# Altium PCB DIOT_Sampler.PCBDOC (part 6 of 8)
Units mm, origin at the board's own origin, x right, y up, seen from the top; angles counter-clockwise.
Board outline 221.17 x 100 mm, 4 copper layers (Top, GP1(GND), L3, Bot), stack 1.648 mm thick; 666 components, 413 nets, 2132 pads, 925 vias.
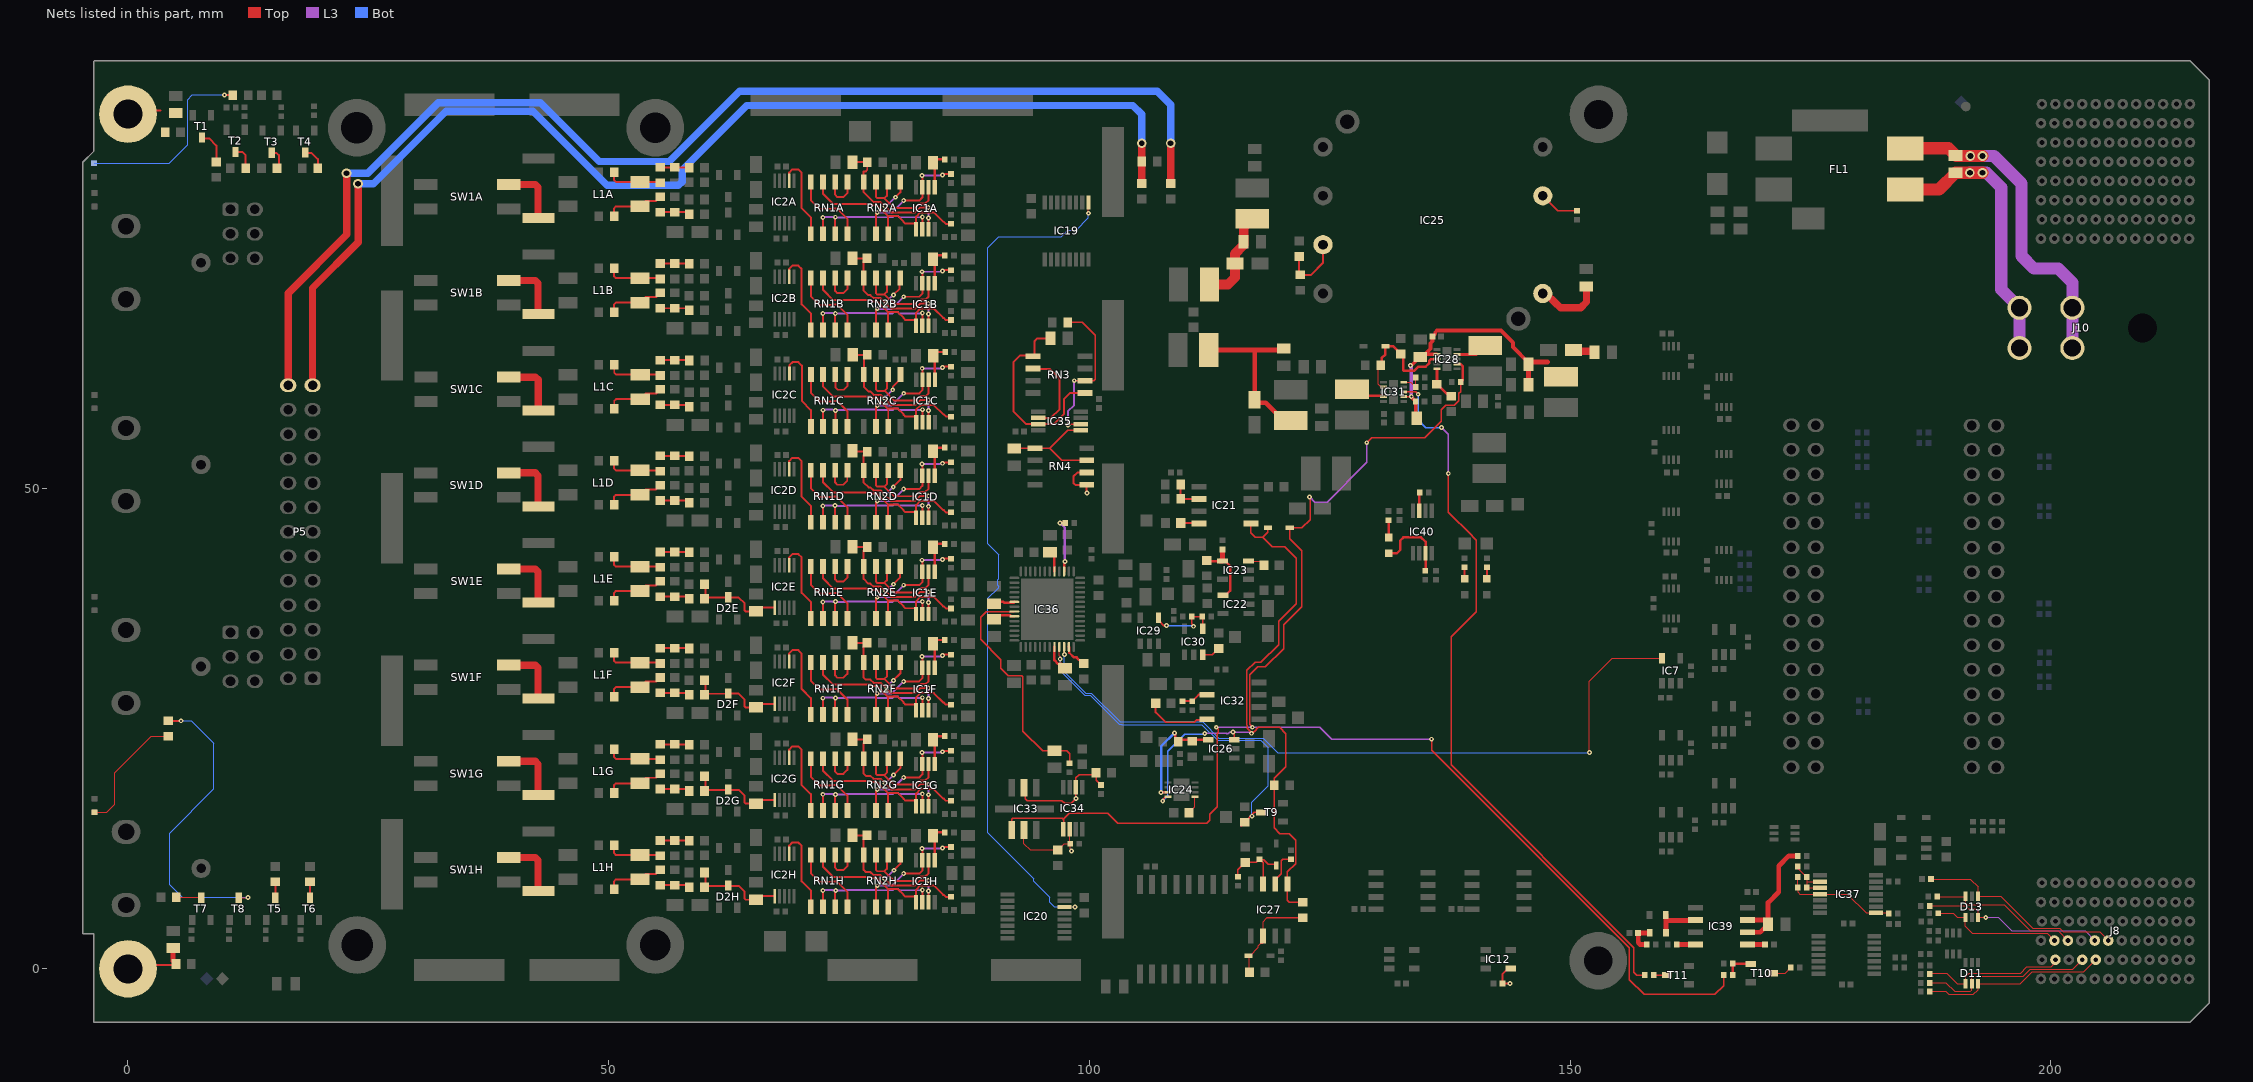
[diagram p7: the nets of this part, all layers, seen from the top]

## Via types
v1: diameter 0.5, hole 0.2, Top to Bot, tented both sides, 704 vias
v2: diameter 0.5, hole 0.2, Top to Bot, 180 vias
v3: diameter 0.6, hole 0.3, Top to Bot, tented both sides, 17 vias
v4: diameter 1, hole 0.6, Top to Bot, tented both sides, 16 vias
v5: diameter 0.6, hole 0.3, Top to Bot, 6 vias
v6: diameter 1.27, hole 0.711, Top to Bot, 2 vias

## Nets (pads, with @x,y where several pads share a name; then routed paths per layer and width w, separated by ;. In a path a pad name is that pad's centre, name@x,y a point inside that pad or via, vN(x,y) a via of type N, cw(c..) or ccw(c..) an arc to the next point about the centre after c; other vN are vias at no path point) (continued)
NetC2E_1: C2E.1 C5E.2 D2E.3 IC2E.1 R10E.2 | length 9.7
  Top w0.203: C5E.2@60.082,39.9 60.082,38.616 62.393,38.616 D2E.3@62.399,38.622 ; D2E.3@62.433,38.656 D2E.3@62.399,38.622 ; IC2E.1@67.275,37.567 65.705,37.567 C2E.1@65.329,37.19 64.249,37.19 64.142,37.298 64.142,38.004 63.524,38.622 D2E.3@62.399,38.622
NetC2F_1: C2F.1 C5F.2 D2F.3 IC2F.1 R10F.2 | length 9.7
  Top w0.203: C5F.2@60.082,29.9 60.082,28.616 62.393,28.616 D2F.3@62.399,28.622 ; D2F.3@62.433,28.656 D2F.3@62.399,28.622 ; IC2F.1@67.275,27.567 65.705,27.567 C2F.1@65.329,27.19 64.249,27.19 64.142,27.298 64.142,28.004 63.524,28.622 D2F.3@62.399,28.622
NetC2G_1: C2G.1 C5G.2 D2G.3 IC2G.1 R10G.2 | length 9.7
  Top w0.203: C5G.2@60.082,19.9 60.082,18.616 62.393,18.616 D2G.3@62.399,18.622 ; D2G.3@62.433,18.656 D2G.3@62.399,18.622 ; IC2G.1@67.275,17.567 65.705,17.567 C2G.1@65.329,17.19 64.249,17.19 64.142,17.298 64.142,18.004 63.524,18.622 D2G.3@62.399,18.622
NetC2H_1: C2H.1 C5H.2 D2H.3 IC2H.1 R10H.2 | length 9.7
  Top w0.203: C5H.2@60.082,9.9 60.082,8.616 62.393,8.616 D2H.3@62.399,8.622 ; D2H.3@62.433,8.656 D2H.3@62.399,8.622 ; IC2H.1@67.275,7.567 65.705,7.567 C2H.1@65.329,7.19 64.249,7.19 64.142,7.298 64.142,8.004 63.524,8.622 D2H.3@62.399,8.622
NetC3A_2: C3A.2 IC1A.3 R7A.2 RN2A.1 RN2A.4 | length 18.6
  Top w0.203: C3A.2@75.369,83.655 C3A.2@75.369,83.905 76.869,83.905 R7A.2@76.894,83.88 76.894,83.105 76.739,82.95 76.524,82.95 RN2A.4@76.524,81.855 76.524,80.775 77.544,79.755 78.294,79.755 v1@78.694,79.355 ; v1(78.744,79.355) v1@78.694,79.355 ; v1(79.819,80.255) 80.334,80.77 RN2A.1@80.334,81.855 ; v1(83.244,79.205) 82.394,79.205 81.869,78.68 79.369,78.68 v1@78.694,79.355 ; v1(83.248,78.109) 83.269,78.088 IC1A.3@83.269,76.909
  L3 w0.203: v1(78.744,79.355) 78.919,79.355 v1(79.819,80.255) ; v1(83.244,79.205) 83.248,79.201 v1(83.248,78.109)
NetC3B_2: C3B.2 IC1B.3 R7B.2 RN2B.1 RN2B.4 | length 18.2
  Top w0.203: C3B.2@75.369,73.905 75.394,73.88 76.844,73.88 76.524,73.56 RN2B.4@76.524,71.855 76.524,70.555 77.003,70.076 77.223,70.076 77.544,69.755 78.294,69.755 v1(78.832,69.217) 79.369,68.68 81.869,68.68 82.394,69.205 v1(83.244,69.205) ; v1(79.619,70.105) 80.269,70.755 80.269,71.79 RN2B.1@80.334,71.855 ; v1(83.248,68.109) 83.269,68.088 IC1B.3@83.269,66.909
  L3 w0.203: v1(78.832,69.217) 78.832,69.318 v1(79.619,70.105) ; v1(83.244,69.205) 83.248,69.201 v1(83.248,68.109)
NetC3C_2: C3C.2 IC1C.3 R7C.2 RN2C.1 RN2C.4 | length 18.1
  Top w0.203: C3C.2@75.382,63.861 75.388,63.855 R7C.2@76.894,63.855 76.537,63.498 RN2C.4@76.537,61.812 76.537,60.53 77.034,60.033 77.235,60.033 77.557,59.711 78.307,59.711 79.382,58.636 81.882,58.636 82.407,59.161 v1(83.257,59.161) ; v1(79.544,60.23) 79.544,60.53 80.347,61.333 RN2C.1@80.347,61.812 ; v1(83.261,58.065) 83.282,58.045 IC1C.3@83.282,56.865
  L3 w0.203: v1(78.694,59.38) v1(79.544,60.23) ; v1(83.257,59.161) 83.261,59.157 v1(83.261,58.065)
NetC3D_2: C3D.2 IC1D.3 R7D.2 RN2D.1 RN2D.4 | length 18.2
  Top w0.203: C3D.2@75.369,53.905 75.469,53.805 R7D.2@76.894,53.805 76.524,53.435 RN2D.4@76.524,51.855 76.524,50.58 77.028,50.076 77.223,50.076 77.544,49.755 78.294,49.755 v1(78.719,49.33) 79.369,48.68 81.869,48.68 82.394,49.205 v1(83.244,49.205) ; v1(79.594,50.13) 80.334,50.87 RN2D.1@80.334,51.855 ; v1(83.248,48.109) 83.269,48.088 IC1D.3@83.269,46.909
  L3 w0.203: v1(78.719,49.33) 78.794,49.33 v1(79.594,50.13) ; v1(83.244,49.205) 83.248,49.201 v1(83.248,48.109)
NetC3E_2: C3E.2 IC1E.3 R7E.2 RN2E.1 RN2E.4 | length 18.3
  Top w0.203: C3E.2@75.369,43.905 75.394,43.88 R7E.2@76.894,43.88 76.524,43.51 RN2E.4@76.524,41.855 76.524,40.555 77.003,40.076 77.223,40.076 77.544,39.755 78.294,39.755 79.369,38.68 81.869,38.68 82.394,39.205 v1(83.244,39.205) ; v1(79.619,40.005) 80.294,40.68 80.294,41.815 RN2E.1@80.334,41.855 ; v1(83.248,38.109) 83.269,38.088 IC1E.3@83.269,36.909
  L3 w0.203: v1(78.794,39.33) 78.944,39.33 v1(79.619,40.005) ; v1(83.244,39.205) 83.248,39.201 v1(83.248,38.109)
NetC3F_2: C3F.2 IC1F.3 R7F.2 RN2F.1 RN2F.4 | length 18.4
  Top w0.203: C3F.2@75.369,33.905 R7F.2@76.869,33.905 76.524,33.56 RN2F.4@76.524,31.855 76.524,30.3 76.748,30.076 77.223,30.076 77.544,29.755 78.294,29.755 79.369,28.68 81.869,28.68 82.394,29.205 v1(83.244,29.205) ; v1(79.619,30.005) 80.334,30.72 RN2F.1@80.334,31.855 ; v1(83.248,28.109) 83.269,28.088 IC1F.3@83.269,26.909
  L3 w0.203: v1(78.929,29.155) 78.929,29.315 v1(79.619,30.005) ; v1(83.244,29.205) 83.248,29.201 v1(83.248,28.109)
NetC3G_2: C3G.2 IC1G.3 R7G.2 RN2G.1 RN2G.4 | length 18.4
  Top w0.203: C3G.2@75.369,23.905 75.394,23.88 R7G.2@76.894,23.88 76.524,23.51 RN2G.4@76.524,21.855 76.524,20.3 76.748,20.076 77.223,20.076 77.544,19.755 78.294,19.755 v1(78.744,19.305) 79.369,18.68 81.869,18.68 82.394,19.205 v1(83.244,19.205) ; v1(79.619,20.155) 80.334,20.87 RN2G.1@80.334,21.855 ; v1(83.248,18.109) 83.269,18.088 IC1G.3@83.269,16.909
  L3 w0.203: v1(78.744,19.305) 78.769,19.305 v1(79.619,20.155) ; v1(83.244,19.205) 83.248,19.201 v1(83.248,18.109)
NetC3H_2: C3H.2 IC1H.3 R7H.2 RN2H.1 RN2H.4 | length 18.3
  Top w0.203: C3H.2@75.394,13.88 R7H.2@76.869,13.88 76.524,13.535 RN2H.4@76.524,11.855 76.524,10.3 76.748,10.076 77.223,10.076 77.544,9.755 78.294,9.755 79.369,8.68 81.869,8.68 82.394,9.205 v1(83.244,9.205) ; v1(79.669,10.255) 80.334,10.92 RN2H.1@80.334,11.855 ; v1(83.248,8.109) 83.269,8.088 IC1H.3@83.269,6.909
  L3 w0.203: v1(78.694,9.405) 78.819,9.405 v1(79.669,10.255) ; v1(83.244,9.205) 83.248,9.201 v1(83.248,8.109)
NetC12A_2: C12A.2 IC1A.5 R13A.2 | length 4
  Top w0.254: IC1A.5@83.919,81.309 83.919,83.655 C12A.2@83.744,83.83 84.119,84.205 R13A.2@84.974,84.205
NetC12B_2: C12B.2 IC1B.5 R13B.2 | length 4
  Top w0.254: IC1B.5@83.919,71.309 83.919,73.655 C12B.2@83.744,73.83 84.119,74.205 R13B.2@84.974,74.205
NetC12C_2: C12C.2 IC1C.5 R13C.2 | length 4
  Top w0.254: IC1C.5@83.932,61.265 83.932,63.611 C12C.2@83.757,63.786 84.132,64.161 R13C.2@84.987,64.161
NetC12D_2: C12D.2 IC1D.5 R13D.2 | length 4
  Top w0.254: IC1D.5@83.919,51.309 83.919,53.655 C12D.2@83.744,53.83 84.119,54.205 R13D.2@84.974,54.205
NetC12E_2: C12E.2 IC1E.5 R13E.2 | length 4
  Top w0.254: IC1E.5@83.919,41.309 83.919,43.655 C12E.2@83.744,43.83 84.119,44.205 R13E.2@84.974,44.205
NetC12F_2: C12F.2 IC1F.5 R13F.2 | length 4
  Top w0.254: IC1F.5@83.919,31.309 83.919,33.655 C12F.2@83.744,33.83 84.119,34.205 R13F.2@84.974,34.205
NetC12G_2: C12G.2 IC1G.5 R13G.2 | length 4
  Top w0.254: IC1G.5@83.919,21.309 83.919,23.655 C12G.2@83.744,23.83 84.119,24.205 R13G.2@84.974,24.205
NetC12H_2: C12H.2 IC1H.5 R13H.2 | length 4
  Top w0.254: IC1H.5@83.919,11.309 83.919,13.655 C12H.2@83.744,13.83 84.119,14.205 R13H.2@84.974,14.205
NetC34_1: C34.1 M3.1 R46.2 | length 3.4
  Top w0.203: M3.1@0,89.292 3.407,89.292
NetC36_1: C36.1 M4.1 R47.2 | length 6.8
  Top w0.203: M4.1@0,0.392 4.882,0.392 R47.2@4.996,0.505
  Top w0.508: C36.1@4.694,2.155 4.694,0.807 R47.2@4.996,0.505
NetC40_1: C40.1 IC21.4 | length 1.9
  Top w0.203: C40.1@109.494,46.38 111.338,46.38 IC21.4@111.393,46.324
NetC42_1: C42.1 IC23.3 | length 1.8
  Top w0.127: IC23.3@116.544,42.419 117.728,42.419 118.14,42.007 C42.1@118.14,41.985
NetC46_1: C46.1 IC24.5 | length 1.9
  Top w0.127: C46.1@110.369,16.23 110.369,16.255 110.969,16.855 IC24.5@110.969,17.884
NetC49_2: C49.2 C50.1 L2.2 L3.1 | length 9.8
  Top w1.016: L3.1@112.475,71.175 114.414,71.175 115.144,71.905 115.144,74.38 116.044,75.28 116.044,77.13 L2.2@116.944,78.03
NetC52_1: C52.1 C53.2 C54.2 C55.2 C56.2 C73.2 C74.2 C85.2 C86.2 IC25.1 IC28.2 IC31.2 L4.2 | length 38
  Top w0.152: IC31.2@132.691,59.52 v1(133.481,59.52)
  Top w0.381: v1(133.391,62.77) 133.523,62.77 C74.2@134.409,63.655 134.645,63.655 C74.2@134.904,63.915 ; v1(133.481,59.52) 133.481,59.48 C85.2@133.941,59.02 133.941,57.37 C86.2@134.041,57.27 ; IC28.2@136.142,63.915 C74.2@134.904,63.915 ; C55.2@145.653,62.901 145.653,63.076 144.06,64.669 144.06,65.139 142.802,66.397 136.149,66.397 135.963,66.211 135.963,66.042 C73.2@135.691,65.77 135.691,65.295 135.475,65.079 135.475,64.486 C74.2@134.904,63.915
  Top w0.508: C56.2@145.653,60.742 C55.2@145.653,62.901 145.865,63.113 147.66,63.113
  Top w0.762: IC25.1@147.154,70.245 147.489,70.245 148.435,69.299 148.458,69.299 148.996,68.76 151.093,68.76 151.694,69.361 C53.2@151.694,70.98 ; C52.1@150.073,64.38 C52.1@150.348,64.38 150.473,64.255 152.419,64.255 C54.2@152.544,64.13
  L3 w0.381: v1(133.391,62.77) 133.391,62.737 133.481,62.647 v1(133.481,59.52)
NetC59_2: C59.2 C60.2 L5.2 L6.1 | length 17.5
  Top w0.508: L6.1@112.4,64.375 117.194,64.375 ; C59.2@120.039,64.375 117.194,64.375 ; L5.2@120.944,57.03 120.194,57.03 118.344,58.88 117.494,58.88 C60.2@117.194,59.18 117.194,64.375
NetC65_2: C65.2 D7.2 IC27.3 R59.2 R62.2 | length 8.1
  Top w0.152: R62.2@115.444,9.6 115.444,10.33 C65.2@116.194,11.08 117.364,11.08 R59.2@117.694,11.41 ; IC27.3@118.059,8.83 118.059,11.015 117.719,11.355 118.119,11.355 118.594,10.88 119.304,10.88 D7.2@119.444,10.74
NetC66_2: C66.2 D8.2 IC28.3 IC31.7 R64.1 | length 13.1
  Top w0.127: R64.1@130.291,62.795 130.316,62.77 130.378,62.77 130.441,62.77 130.378,62.707 130.05,62.379 130.05,60.791 130.235,60.606 130.504,60.606 IC31.7@130.591,60.52
  Top w0.254: R64.1@130.291,62.795 130.353,62.857 130.398,62.902 130.398,63.527 130.788,63.917 130.788,64.763 D8.2@130.781,64.77 ; D8.2@130.788,64.77 131.591,64.77 C66.2@132.391,63.97 132.641,63.72 132.641,62.27 132.718,62.193 133.776,62.193 134.233,62.649 134.987,62.649 135.363,63.025 135.363,63.27 135.508,63.415 IC28.3@136.142,63.415
NetC72_2: C72.2 D9.2 IC27.6 R67.1 | length 10.5
  Top w0.127: C72.2@116.644,-0.37 116.644,1.29 D9.2@116.554,1.38 116.719,1.38 117.579,2.24 117.579,2.412 117.837,2.671 118.01,2.671 118.059,2.72 IC27.6@118.059,3.43 118.059,4.92 118.469,5.33
  Top w0.152: 118.469,5.33 R67.1@122.194,5.33
NetC75_1: C75.1 IC30.3 | length 1.9
  Top w0.152: IC30.3@111.795,32.679 112.793,32.679 C75.1@113.444,33.33
NetC82_1: C82.1 IC32.4 | length 6.9
  Top w0.203: C82.1@106.894,27.63 106.894,26.68 107.923,25.651 110.892,25.651 111.121,25.88 112.149,25.88 IC32.4@112.244,25.975
NetC95_2: C95.2 IC36.22 | length 2.4
  Top w0.254: IC36.22@96.364,33.49 96.364,32.111 96.749,31.725 97.093,31.725 C95.2@97.21,31.608
NetC96_2: C96.2 IC36.9 | length 2.3
  Top w0.254: C96.2@90.069,36.366 90.464,36.761 91.748,36.761 91.844,36.665 IC36.9@92.189,36.665
NetC97_2: C97.2 IC36.6 | length 2.3
  Top w0.254: C97.2@90.069,37.995 90.239,38.165 91.055,38.165 91.135,38.085 92.109,38.085 IC36.6@92.189,38.165
NetC98_2: C98.2 IC36.45 | length 2.2
  Top w0.254: C98.2@95.915,43.321 96.364,42.871 IC36.45@96.364,41.34
NetC99_2: C99.2 IC36.8 R81.2 | length 25
  Top w0.152: IC36.8@92.189,37.165 91.24,37.165 91.194,37.12 89.26,37.12 88.694,36.554 88.694,34.271 90.797,32.168 90.797,31.277 91.564,30.51 92.965,30.51 93.084,30.391 93.084,24.74 95.122,22.702 C99.2@96.374,22.702 97.622,22.702 97.948,22.376 R81.2@97.948,21.408
NetC101_2: C101.2 IC33.2 IC34.2 R80.2 | length 9.1
  Top w0.127: IC33.2@93.194,14.434 93.194,13.035 93.863,12.366 96.739,12.366 97.151,12.778 97.151,12.803 97.361,13.013 R80.2@97.864,13.013 ; IC34.2@97.944,14.505 97.944,13.093 R80.2@97.864,13.013 ; v1(98.144,12.259) 98.144,12.36 98.012,12.492 R80.2@98.012,13.013 R80.2@97.864,13.013
NetC102_2: C102.2 IC33.6 IC34.6 R82.1 | length 12.9
  Top w0.152: IC33.6@93.194,18.834 93.301,18.727 93.301,17.711 93.526,17.486 97.146,17.486 97.415,17.217 98.1,17.217 v1(98.594,17.711) IC34.6@98.594,18.905 98.594,19.866 98.944,20.216 100.501,20.216 C102.2@100.694,20.409 100.694,19.63 101.199,19.125 R82.1@101.219,19.125 R82.1@101.239,19.125
NetC103_2: C103.2 IC35.3 RN3.1 RN3.5 | length 21.1
  Top w0.203: C103.2@95.944,65.58 94.569,65.58 94.294,65.305 94.294,63.86 RN3.5@94.144,63.71 94.074,63.78 92.769,63.78 92.09,63.101 92.09,58.009 93.444,56.655 IC35.3@94.694,56.655 96.294,56.655 97.344,57.705 97.344,59.255 97.989,59.9 RN3.1@99.544,59.9
NetC106_2: C106.2 IC35.5 RN4.3 RN4.5 | length 12
  Top w0.152: C106.2@92.194,54.13 95.894,54.13 ; IC35.5@99.094,56.005 97.769,56.005 95.894,54.13 ; RN4.3@99.719,52.89 97.134,52.89 95.894,54.13
NetC109_2: C109.2 IC39.6 IC39.7 R112.2 | length 13.7
  Top w0.508: IC39.6@168.43,3.815 169.752,3.815 C109.2@170.59,4.652 ; IC39.7@168.43,5.085 170.157,5.085 C109.2@170.59,4.652 ; R112.2@173.66,11.75 172.753,11.75 171.7,10.697 171.7,8 170.59,6.89 C109.2@170.59,4.652
NetC111_2: C111.2 IC39.5 | length 1.9
  Top w0.508: IC39.5@168.43,2.545 170.275,2.545 C111.2@170.28,2.55
NetC112_2: C112.2 D15.1 R113.2 | length 3.2
  Top w0.508: R113.2@157.96,2.55 157.272,2.55 157.08,2.742 C112.2@157.08,3.75 D15.1@158.28,3.75
NetC116_1: C116.1 FL1.3 J10.1 J10.2 | length 35.6
  Top w1.27: FL1.3@184.875,85.35 189.35,85.35 190.15,84.55 v4(191.63,84.55) v4(192.891,84.55)
  L3 w1.27: v4(191.63,84.55) 192.63,84.55 194.071,84.55 196.93,81.691 196.93,74.15 198.23,72.85 200.758,72.85 202.235,71.373 J10.1@202.235,68.767 J10.2@202.235,64.567
NetC116_2: C116.2 FL1.1 J10.3 J10.4 | length 30.1
  Top w1.27: FL1.1@184.875,81.05 187.596,81.05 188.35,81.05 C116.2@190.1,82.8 v4(191.58,82.8) v4(192.891,82.8)
  L3 w1.27: v4(191.58,82.8) v4(192.891,82.8) 193.301,82.8 194.844,81.257 194.844,70.658 J10.3@196.735,68.767 J10.4@196.735,64.567
NetC119_2: C119.2 IC12.4 | length 2.9
  Top w0.203: v2(143.752,-1.507) 143.65,-1.507 143.65,-1.5 C119.2@142.95,-1.5 142.95,-0.55 143.55,0.05 IC12.4@143.8,0.05
NetD10_1: D10.1 IC28.7 IC33.1 IC34.1 R69.1 R157.1 | length 157.6
  Top w0.152: IC33.1@91.924,14.434 91.924,15.584 92.013,15.673 97.15,15.673 97.343,15.48 ; IC34.1@97.343,14.578 97.343,15.48 ; v1(113.194,25.13) 113.417,24.907 113.417,24.608 113.28,24.472 113.28,16.869 112.518,16.106 112.518,15.48 112.182,15.144 102.966,15.144 101.93,16.18 97.923,16.18 97.343,15.601 97.343,15.48 ; v1(116.944,25.13) 116.944,25.172 116.666,25.45 116.666,30.566 117.5,31.4 118.3,31.4 120.194,33.294 120.194,35.777 122.1,37.683 122.1,43.49 120.834,44.756 D10.1@120.834,45.88 122.096,45.88 122.952,46.736 122.952,49.036 v1(122.903,49.084) ; v1(128.841,54.729) 128.861,54.729 129.374,55.242 134.869,55.242 136.594,56.967 136.594,58.16 137.057,58.623 137.931,58.623 138.42,59.111 138.42,59.853 138.611,60.044 R69.1@138.611,61.02 ; v2(135.59,23.89) 135.59,22.764 154.271,4.083 156.147,2.207 156.147,-1.116 157.691,-2.66 165.06,-2.66 165.96,-1.76 R157.1@165.96,-0.65
  Top w0.254: IC28.7@138.242,62.915 138.611,62.915 138.611,62.881 138.674,62.819 138.698,62.819 138.846,62.67 138.846,61.255 R69.1@138.611,61.02
  L3 w0.152: v1(113.194,25.13) v1(116.944,25.13) 123.949,25.13 125.189,23.89 v2(135.59,23.89) ; v1(122.903,49.084) 123.433,48.555 124.72,48.555 128.841,52.676 v1(128.841,54.729)
NetD10_2: D10.2 IC21.5 IC24.4 IC26.3 IC27.1 R53.1 R67.2 | length 71.2
  Top w0.152: v1(107.627,17.473) 107.627,17.567 107.944,17.884 IC24.4@108.169,17.884 ; v1(114.944,24.63) 115.044,24.53 IC26.3@115.044,23.83 ; IC21.5@116.793,46.324 116.793,45.352 117.266,44.88 118.044,44.88 ; D10.2@118.554,45.88 118.554,45.39 118.044,44.88 ; R67.2@122.444,7.18 R67.2@122.194,6.93 120.794,6.93 120.599,7.125 IC27.1@120.599,8.83 120.599,10.085 121.457,10.943 121.457,13.367 120.762,14.062 119.812,14.062 119.219,14.655 119.219,15.955 R53.1@119.219,19.08 119.219,19.805 120.444,21.03 120.444,24.48 119.794,25.13 117.585,25.13 117.132,24.677 116.756,24.677 116.397,25.036 116.397,25.323 116.386,25.334 116.386,31.038 117.228,31.88 117.844,31.88 119.702,33.738 119.702,35.742 119.702,36.138 121.528,37.964 121.528,42.716 120.33,43.914 119.01,43.914 118.044,44.88
  L3 w0.152: v1(111.999,24.482) 114.251,24.482 114.286,24.447 114.413,24.447 114.596,24.63 v1(114.944,24.63) 116.709,24.63 116.836,24.503 v1(116.86,24.503)
  Bot w0.152: v1(107.627,17.473) 108.153,17.999 108.153,22.639 109.903,24.389 111.91,24.389 111.999,24.479 v1(111.999,24.482)
NetD11_4: D11.4 J8.K2 R98.2 | length 15.1
  Top w0.127: R98.2@187.5,-0.45 189.169,-0.45 190.269,-1.55 D11.4@191.13,-1.55 191.13,-0.84 191.52,-0.45 196.859,-0.45 197.513,0.204 200.043,0.204 200.469,0.63 J8.K2@200.469,0.95
NetD11_5: D11.5 J8.I2 R95.2 | length 18.3
  Top w0.127: R95.2@187.4,-1.45 189.08,-1.45 189.98,-2.35 191.63,-2.35 191.78,-2.2 D11.5@191.78,-1.55 191.78,-0.94 191.97,-0.75 197.141,-0.75 197.841,-0.05 202.269,-0.05 J8.I2@203.269,0.95
NetD11_6: D11.6 J8.H2 R93.2 | length 19.1
  Top w0.127: R93.2@187.6,-2.35 189.07,-2.35 189.38,-2.66 191.942,-2.66 192.43,-2.172 D11.6@192.43,-1.55 196.818,-1.55 198.059,-0.309 203.41,-0.309 J8.H2@204.669,0.95
NetD13_1: D13.1 J8.G3 R92.2 | length 21.6
  Top w0.127: R92.2@187.533,9.339 191.61,9.339 192.43,8.519 D13.1@192.43,7.55 194.765,7.55 198.111,4.204 200.944,4.204 201.298,3.85 205.069,3.85 J8.G3@205.969,2.95
NetD13_3: D13.3 J8.J3 R96.2 | length 15.9
  Top w0.127: R96.2@188.18,7.515 D13.3@191.13,7.515 ; D13.3@191.13,7.55 D13.3@191.13,7.515 ; J8.J3@201.769,2.95 200.769,3.95 197.83,3.95 196.17,5.61 195.13,6.65 191.369,6.65 191.13,6.889 D13.3@191.13,7.515
NetD13_4: D13.4 J8.K3 R97.2 | length 13.8
  Top w0.127: R97.2@188.3,5.786 189.823,5.786 190.259,5.35 D13.4@191.13,5.35 ; D13.4@191.109,5.35 191.109,4.425 191.838,3.696 193.783,3.696 199.623,3.696 J8.K3@200.369,2.95
NetD13_6: D13.6 J8.H3 R48.2 | length 19
  Top w0.127: R48.2@187.42,6.561 191.069,6.561 191.38,6.25 192.201,6.25 192.43,6.021 D13.6@192.43,5.35 v2(193.23,5.35)
  L3 w0.127: v2(193.23,5.35) 194.53,5.35 195.93,3.95 203.569,3.95 J8.H3@204.569,2.95
NetD14_2: D14.2 D15.2 IC39.2 | length 4.9
  Top w0.508: D14.2@159.95,5.6 159.98,5.57 159.98,5.05 ; D15.2@159.98,3.75 159.98,5.05 ; IC39.2@163.03,5.085 162.995,5.05 159.98,5.05
NetD24_1: D24.1 R38.1 | length 20.1
  Top w0.203: v2(10.025,90.88) R38.1@10.894,90.88
  Bot w0.127: D24.1@-3.52,83.8 4.299,83.8 6.2,85.701 6.2,90.4 6.7,90.9 10.005,90.9 v2(10.025,90.88)
NetD26_1: D26.1 R44.1 | length 12.9
  Top w0.127: D26.1@-3.49,16.3 -2.2,16.3 -1.4,17.1 -1.4,20.4 2.4,24.2 R44.1@4.2,24.2
NetIC1A_1: IC1A.1 R6A.1 RN1A.7 RN2A.7 | length 19.7
  Top w0.203: RN1A.7@72.288,81.857 72.288,80.611 73.344,79.555 77.277,79.555 77.407,79.425 77.91,79.425 79.064,78.27 ; RN2A.7@79.064,76.455 79.064,78.27 ; IC1A.1@81.969,76.909 IC1A.1@81.969,77.506 ; R6A.1@85.603,77.486 85.073,77.486 84.853,77.706 84.793,77.706 83.815,78.684 82.421,78.684 81.969,78.232 IC1A.1@81.969,77.506 ; 79.064,78.27 79.103,78.309 80.067,78.309 80.665,77.711 80.665,77.67 80.829,77.506 IC1A.1@81.969,77.506
NetIC1A_2: IC1A.2 RN1A.2 RN1A.3 | length 15
  Top w0.203: v1(72.269,78.155) 72.269,76.477 RN1A.2@72.288,76.457 ; RN1A.3@73.558,76.457 73.558,78.169 v1(73.569,78.18) ; IC1A.2@82.619,76.909 v1(82.619,78.205)
  L3 w0.203: v1(72.269,78.155) 72.319,78.205 73.292,78.205 ; v1@73.569,78.151 74.74,78.151 74.794,78.205 77.703,78.205 77.731,78.177 79.539,78.177 79.671,78.309 80.067,78.309 80.199,78.177 82.591,78.177 v1(82.619,78.205)
NetIC1A_6: IC1A.6 RN2A.2 RN2A.3 | length 11.1
  Top w0.203: RN2A.3@77.794,81.855 77.794,80.29 77.929,80.155 78.679,80.155 ; RN2A.2@79.064,81.855 78.929,81.72 78.929,80.405 78.679,80.155 ; IC1A.6@83.269,81.309 83.269,79.934 82.944,79.609 82.465,79.609 82.391,79.535 82.257,79.535 81.877,79.155 79.679,79.155 78.679,80.155
NetIC1A_7: IC1A.7 R12A.1 RN2A.6 | length 13
  Top w0.203: RN2A.6@77.794,76.455 77.794,78.52 v1(77.929,78.655) ; v1(80.679,79.905) 82.294,79.905 82.619,80.23 IC1A.7@82.619,81.309 82.619,82.48 v1(82.594,82.505) ; v1(84.719,82.58) 84.815,82.676 R12A.1@85.603,82.676
  L3 w0.203: v1(77.929,78.655) 79.429,78.655 v1(80.679,79.905) ; v1(82.594,82.505) 84.644,82.505 v1(84.719,82.58)
NetIC1B_1: IC1B.1 R6B.1 RN1B.7 RN2B.7 | length 19.7
  Top w0.203: RN1B.7@72.288,71.857 72.288,70.611 73.344,69.555 77.277,69.555 77.407,69.425 77.91,69.425 79.064,68.27 ; RN2B.7@79.064,66.455 79.064,68.27 ; IC1B.1@81.969,66.909 IC1B.1@81.969,67.506 ; R6B.1@85.603,67.486 85.073,67.486 84.853,67.706 84.793,67.706 83.815,68.684 82.421,68.684 81.969,68.232 IC1B.1@81.969,67.506 ; 79.064,68.27 79.103,68.309 80.067,68.309 80.665,67.711 80.665,67.67 80.829,67.506 IC1B.1@81.969,67.506
NetIC1B_2: IC1B.2 RN1B.2 RN1B.3 | length 15
  Top w0.203: v1(72.269,68.155) 72.269,66.477 RN1B.2@72.288,66.457 ; RN1B.3@73.558,66.457 73.558,68.169 v1(73.569,68.18) ; IC1B.2@82.619,66.909 v1(82.619,68.205)
  L3 w0.203: v1(72.269,68.155) 72.319,68.205 73.292,68.205 ; v1@73.569,68.151 74.74,68.151 74.794,68.205 77.703,68.205 77.731,68.177 79.539,68.177 79.671,68.309 80.067,68.309 80.199,68.177 82.591,68.177 v1(82.619,68.205)
NetIC1B_6: IC1B.6 RN2B.2 RN2B.3 | length 11.1
  Top w0.203: RN2B.3@77.794,71.855 77.794,70.29 77.929,70.155 78.679,70.155 ; RN2B.2@79.064,71.855 78.929,71.72 78.929,70.405 78.679,70.155 ; IC1B.6@83.269,71.309 83.269,69.934 82.944,69.609 82.465,69.609 82.391,69.535 82.257,69.535 81.877,69.155 79.679,69.155 78.679,70.155
NetIC1B_7: IC1B.7 R12B.1 RN2B.6 | length 13
  Top w0.203: RN2B.6@77.794,66.455 77.794,68.52 v1(77.929,68.655) ; v1(80.679,69.905) 82.294,69.905 82.619,70.23 82.619,72.48 v1(82.594,72.505) ; v1(84.719,72.58) 84.815,72.676 R12B.1@85.603,72.676
  L3 w0.203: v1(77.929,68.655) 79.429,68.655 v1(80.679,69.905) ; v1(82.594,72.505) 84.644,72.505 v1(84.719,72.58)
NetIC1C_1: IC1C.1 R6C.1 RN1C.7 RN2C.7 | length 19.7
  Top w0.203: RN1C.7@72.301,61.813 72.301,60.567 73.357,59.511 77.29,59.511 77.42,59.381 77.923,59.381 79.077,58.227 ; RN2C.7@79.077,56.412 79.077,58.227 ; IC1C.1@81.982,56.865 IC1C.1@81.982,57.462 ; R6C.1@85.616,57.442 85.086,57.442 84.866,57.662 84.805,57.662 83.828,58.64 82.433,58.64 81.982,58.188 IC1C.1@81.982,57.462 ; 79.077,58.227 79.115,58.265 80.08,58.265 80.677,57.667 80.677,57.626 80.841,57.462 IC1C.1@81.982,57.462
NetIC1C_2: IC1C.2 RN1C.2 RN1C.3 | length 14.9
  Top w0.203: v1(72.282,58.111) 72.282,56.433 RN1C.2@72.301,56.413 ; RN1C.3@73.571,56.413 73.571,58.057 v1(73.594,58.08) ; IC1C.2@82.632,56.865 v1(82.632,58.161)
  L3 w0.203: v1(72.282,58.111) 72.332,58.161 73.305,58.161 ; v1@73.594,58.108 74.753,58.108 74.807,58.161 77.716,58.161 77.744,58.133 79.552,58.133 79.683,58.265 80.08,58.265 80.212,58.133 82.603,58.133 v1(82.632,58.161)
NetIC1C_6: IC1C.6 RN2C.2 RN2C.3 | length 11.1
  Top w0.203: RN2C.3@77.807,61.812 77.807,60.247 77.942,60.112 78.692,60.112 ; RN2C.2@79.077,61.812 78.942,61.677 78.942,60.362 78.692,60.112 ; IC1C.6@83.282,61.265 83.282,59.89 82.957,59.565 82.477,59.565 82.404,59.491 82.27,59.491 81.89,59.112 79.692,59.112 78.692,60.112
NetIC1C_7: IC1C.7 R12C.1 RN2C.6 | length 13
  Top w0.203: RN2C.6@77.807,56.412 77.807,58.477 v1(77.942,58.612) ; v1(80.692,59.862) 82.307,59.862 82.632,60.186 IC1C.7@82.632,61.265 82.632,62.436 v1(82.607,62.461) ; v1(84.732,62.536) 84.828,62.632 R12C.1@85.616,62.632
  L3 w0.203: v1(77.942,58.612) 79.442,58.612 v1(80.692,59.862) ; v1(82.607,62.461) 84.657,62.461 v1(84.732,62.536)
NetIC1D_1: IC1D.1 R6D.1 RN1D.7 RN2D.7 | length 19.7
  Top w0.203: RN1D.7@72.288,51.857 72.288,50.611 73.344,49.555 77.277,49.555 77.407,49.425 77.91,49.425 79.064,48.27 ; RN2D.7@79.064,46.455 79.064,48.27 ; IC1D.1@81.969,46.909 IC1D.1@81.969,47.506 ; R6D.1@85.603,47.486 85.073,47.486 84.853,47.706 84.793,47.706 83.815,48.684 82.421,48.684 81.969,48.232 IC1D.1@81.969,47.506 ; 79.064,48.27 79.103,48.309 80.067,48.309 80.665,47.711 80.665,47.67 80.829,47.506 IC1D.1@81.969,47.506
NetIC1D_2: IC1D.2 RN1D.2 RN1D.3 | length 15
  Top w0.203: v1(72.269,48.155) 72.269,46.477 RN1D.2@72.288,46.457 ; v1(73.544,48.18) 73.558,48.166 RN1D.3@73.558,46.457 ; IC1D.2@82.619,46.909 v1(82.619,48.205)
  L3 w0.203: v1(72.269,48.155) 72.319,48.205 73.292,48.205 ; v1@73.544,48.151 74.74,48.151 74.794,48.205 77.703,48.205 77.731,48.177 79.539,48.177 79.671,48.309 80.067,48.309 80.199,48.177 82.591,48.177 v1(82.619,48.205)
NetIC1D_6: IC1D.6 RN2D.2 RN2D.3 | length 11.1
  Top w0.203: RN2D.3@77.794,51.855 77.794,50.29 77.929,50.155 78.679,50.155 ; RN2D.2@79.064,51.855 78.929,51.72 78.929,50.405 78.679,50.155 ; IC1D.6@83.269,51.309 83.269,49.934 82.944,49.609 82.465,49.609 82.391,49.535 82.257,49.535 81.877,49.155 79.679,49.155 78.679,50.155
NetIC1D_7: IC1D.7 R12D.1 RN2D.6 | length 13
  Top w0.203: RN2D.6@77.794,46.455 77.794,48.52 v1(77.929,48.655) ; v1(80.679,49.905) 82.294,49.905 82.619,50.23 82.619,52.48 v1(82.594,52.505) ; v1(84.719,52.58) 84.815,52.676 R12D.1@85.603,52.676
  L3 w0.203: v1(77.929,48.655) 79.429,48.655 v1(80.679,49.905) ; v1(82.594,52.505) 84.644,52.505 v1(84.719,52.58)
NetIC1E_1: IC1E.1 R6E.1 RN1E.7 RN2E.7 | length 19.7
  Top w0.203: RN1E.7@72.288,41.857 72.288,40.611 73.344,39.555 77.277,39.555 77.407,39.425 77.91,39.425 79.064,38.27 ; RN2E.7@79.064,36.455 79.064,38.27 ; IC1E.1@81.969,36.909 IC1E.1@81.969,37.506 ; R6E.1@85.603,37.486 85.073,37.486 84.853,37.706 84.793,37.706 83.815,38.684 82.421,38.684 81.969,38.232 IC1E.1@81.969,37.506 ; 79.064,38.27 79.103,38.309 80.067,38.309 80.665,37.711 80.665,37.67 80.829,37.506 IC1E.1@81.969,37.506
NetIC1E_2: IC1E.2 RN1E.2 RN1E.3 | length 15.1
  Top w0.203: v1(72.269,38.155) 72.269,36.477 RN1E.2@72.288,36.457 ; RN1E.3@73.558,36.457 73.558,38.169 v1(73.594,38.205) ; IC1E.2@82.619,36.909 v1(82.619,38.205)
  L3 w0.203: v1(72.269,38.155) 72.319,38.205 73.292,38.205 73.346,38.151 ; v1@73.594,38.151 74.74,38.151 74.794,38.205 77.703,38.205 77.731,38.177 79.539,38.177 79.671,38.309 80.067,38.309 80.199,38.177 82.591,38.177 v1(82.619,38.205)
NetIC1E_6: IC1E.6 RN2E.2 RN2E.3 | length 11.1
  Top w0.203: RN2E.3@77.794,41.855 77.794,40.29 77.929,40.155 78.679,40.155 ; RN2E.2@79.064,41.855 78.929,41.72 78.929,40.405 78.679,40.155 ; IC1E.6@83.269,41.309 83.269,39.934 82.944,39.609 82.465,39.609 82.391,39.535 82.257,39.535 81.877,39.155 79.679,39.155 78.679,40.155
NetIC1E_7: IC1E.7 R12E.1 RN2E.6 | length 13
  Top w0.203: RN2E.6@77.794,36.455 77.794,38.52 v1(77.929,38.655) ; v1(80.679,39.905) 82.294,39.905 82.619,40.23 82.619,42.48 v1(82.594,42.505) ; v1(84.719,42.58) 84.815,42.676 R12E.1@85.603,42.676
  L3 w0.203: v1(77.929,38.655) 79.429,38.655 v1(80.679,39.905) ; v1(82.594,42.505) 84.644,42.505 v1(84.719,42.58)
NetIC1F_1: IC1F.1 R6F.1 RN1F.7 RN2F.7 | length 19.7
  Top w0.203: RN1F.7@72.288,31.857 72.288,30.611 73.344,29.555 77.277,29.555 77.407,29.425 77.91,29.425 79.064,28.27 ; RN2F.7@79.064,26.455 79.064,28.27 ; IC1F.1@81.969,26.909 IC1F.1@81.969,27.506 ; R6F.1@85.603,27.486 85.073,27.486 84.853,27.706 84.793,27.706 83.815,28.684 82.421,28.684 81.969,28.232 IC1F.1@81.969,27.506 ; 79.064,28.27 79.103,28.309 80.067,28.309 80.665,27.711 80.665,27.67 80.829,27.506 IC1F.1@81.969,27.506
NetIC1F_2: IC1F.2 RN1F.2 RN1F.3 | length 15
  Top w0.203: v1(72.269,28.155) 72.269,26.477 RN1F.2@72.288,26.457 ; RN1F.3@73.558,26.457 73.558,28.144 v1(73.594,28.18) ; IC1F.2@82.619,26.909 v1(82.619,28.205)
  L3 w0.203: v1(72.269,28.155) 72.319,28.205 73.292,28.205 73.346,28.151 ; v1@73.594,28.151 74.74,28.151 74.794,28.205 77.703,28.205 77.731,28.177 79.539,28.177 79.671,28.309 80.067,28.309 80.199,28.177 82.591,28.177 v1(82.619,28.205)
NetIC1F_6: IC1F.6 RN2F.2 RN2F.3 | length 11.1
  Top w0.203: RN2F.3@77.794,31.855 77.794,30.29 77.929,30.155 78.679,30.155 ; RN2F.2@79.064,31.855 78.929,31.72 78.929,30.405 78.679,30.155 ; IC1F.6@83.269,31.309 83.269,29.934 82.944,29.609 82.465,29.609 82.391,29.535 82.257,29.535 81.877,29.155 79.679,29.155 78.679,30.155
NetIC1F_7: IC1F.7 R12F.1 RN2F.6 | length 13
  Top w0.203: RN2F.6@77.794,26.455 77.794,28.52 v1(77.929,28.655) ; v1(80.679,29.905) 82.294,29.905 82.619,30.23 IC1F.7@82.619,31.309 82.619,32.48 v1(82.594,32.505) ; v1(84.719,32.58) 84.815,32.676 R12F.1@85.603,32.676
  L3 w0.203: v1(77.929,28.655) 79.429,28.655 v1(80.679,29.905) ; v1(82.594,32.505) 84.644,32.505 v1(84.719,32.58)
NetIC1G_1: IC1G.1 R6G.1 RN1G.7 RN2G.7 | length 19.7
  Top w0.203: RN1G.7@72.288,21.857 72.288,20.611 73.344,19.555 77.277,19.555 77.407,19.425 77.91,19.425 79.064,18.27 ; RN2G.7@79.064,16.455 79.064,18.27 ; IC1G.1@81.969,16.909 IC1G.1@81.969,17.506 ; R6G.1@85.603,17.486 85.073,17.486 84.853,17.706 84.793,17.706 83.815,18.684 82.421,18.684 81.969,18.232 IC1G.1@81.969,17.506 ; 79.064,18.27 79.103,18.309 80.067,18.309 80.665,17.711 80.665,17.67 80.829,17.506 IC1G.1@81.969,17.506
NetIC1G_2: IC1G.2 RN1G.2 RN1G.3 | length 15.3
  Top w0.203: v1(72.269,18.155) 72.298,18.126 72.298,17.207 72.269,17.178 72.269,16.477 RN1G.2@72.288,16.457 ; RN1G.3@73.558,16.457 73.558,18.116 v1(73.594,18.151) ; IC1G.2@82.619,16.909 v1(82.619,18.205)
  L3 w0.203: v1(72.269,18.155) 72.319,18.205 73.292,18.205 73.346,18.151 v1(73.594,18.151) 74.74,18.151 74.794,18.205 77.703,18.205 77.731,18.177 79.539,18.177 79.671,18.309 80.067,18.309 80.199,18.177 82.591,18.177 v1(82.619,18.205)
NetIC1G_6: IC1G.6 RN2G.2 RN2G.3 | length 11.1
  Top w0.203: RN2G.3@77.794,21.855 77.794,20.29 77.929,20.155 78.679,20.155 ; RN2G.2@79.064,21.855 78.929,21.72 78.929,20.405 78.679,20.155 ; IC1G.6@83.269,21.309 83.269,19.934 82.944,19.609 82.465,19.609 82.391,19.535 82.257,19.535 81.877,19.155 79.679,19.155 78.679,20.155
NetIC1G_7: IC1G.7 R12G.1 RN2G.6 | length 13
  Top w0.203: RN2G.6@77.794,16.455 77.794,18.52 v1(77.929,18.655) ; v1(80.679,19.905) 82.294,19.905 82.619,20.23 82.619,22.48 v1(82.594,22.505) ; v1(84.719,22.58) 84.815,22.676 R12G.1@85.603,22.676
  L3 w0.203: v1(77.929,18.655) 79.429,18.655 v1(80.679,19.905) ; v1(82.594,22.505) 84.644,22.505 v1(84.719,22.58)
NetIC1H_1: IC1H.1 R6H.1 RN1H.7 RN2H.7 | length 19.7
  Top w0.203: RN1H.7@72.288,11.857 72.288,10.611 73.344,9.555 77.277,9.555 77.407,9.425 77.91,9.425 79.064,8.27 ; RN2H.7@79.064,6.455 79.064,8.27 ; IC1H.1@81.969,6.909 IC1H.1@81.969,7.506 ; R6H.1@85.603,7.486 85.073,7.486 84.853,7.706 84.793,7.706 83.815,8.684 82.421,8.684 81.969,8.232 IC1H.1@81.969,7.506 ; 79.064,8.27 79.103,8.309 80.067,8.309 80.665,7.711 80.665,7.67 80.829,7.506 IC1H.1@81.969,7.506
NetIC1H_2: IC1H.2 RN1H.2 RN1H.3 | length 15.3
  Top w0.203: v1(72.269,8.155) 72.269,6.477 RN1H.2@72.288,6.457 ; RN1H.3@73.558,6.457 73.558,8.091 v1(73.619,8.151) ; IC1H.2@82.619,6.909 v1(82.619,8.205)
  L3 w0.203: v1(72.269,8.155) 72.319,8.205 73.292,8.205 73.346,8.151 v1(73.619,8.151) 74.74,8.151 74.794,8.205 77.703,8.205 77.731,8.177 79.539,8.177 79.671,8.309 80.067,8.309 80.199,8.177 82.591,8.177 v1(82.619,8.205)
NetIC1H_6: IC1H.6 RN2H.2 RN2H.3 | length 11.1
  Top w0.203: RN2H.3@77.794,11.855 77.794,10.29 77.929,10.155 78.679,10.155 ; RN2H.2@79.064,11.855 78.929,11.72 78.929,10.405 78.679,10.155 ; IC1H.6@83.269,11.309 83.269,9.934 82.944,9.609 82.465,9.609 82.391,9.535 82.257,9.535 81.877,9.155 79.679,9.155 78.679,10.155
NetIC1H_7: IC1H.7 R12H.1 RN2H.6 | length 13
  Top w0.203: RN2H.6@77.794,6.455 77.794,8.52 v1(77.929,8.655) ; v1(80.679,9.905) 82.294,9.905 82.619,10.23 82.619,12.48 v1(82.594,12.505) ; v1(84.719,12.58) 84.815,12.676 R12H.1@85.603,12.676
  L3 w0.203: v1(77.929,8.655) 79.429,8.655 v1(80.679,9.905) ; v1(82.594,12.505) 84.644,12.505 v1(84.719,12.58)
NetIC2A_7: IC2A.7 RN1A.1 | length 9.2
  Top w0.203: IC2A.7@68.775,81.967 68.775,82.815 69.105,83.145 69.723,83.145 70.075,82.793 70.075,79.11 71.018,78.167 RN1A.1@71.018,76.457
NetIC2B_7: IC2B.7 RN1B.1 | length 9.2
  Top w0.203: IC2B.7@68.775,71.967 68.775,72.815 69.105,73.145 69.723,73.145 70.075,72.793 70.075,69.11 71.018,68.167 RN1B.1@71.018,66.457
NetIC2C_7: IC2C.7 RN1C.1 | length 9.2
  Top w0.203: IC2C.7@68.788,61.923 68.788,62.771 69.118,63.101 69.736,63.101 70.088,62.749 70.088,59.066 71.031,58.123 RN1C.1@71.031,56.413
NetIC2D_7: IC2D.7 RN1D.1 | length 9.2
  Top w0.203: IC2D.7@68.775,51.967 68.775,52.815 69.105,53.145 69.723,53.145 70.075,52.793 70.075,49.11 71.018,48.167 RN1D.1@71.018,46.457
NetIC2E_7: IC2E.7 RN1E.1 | length 9.2
  Top w0.203: IC2E.7@68.775,41.967 68.775,42.815 69.105,43.145 69.723,43.145 70.075,42.793 70.075,39.11 71.018,38.167 RN1E.1@71.018,36.457
NetIC2F_7: IC2F.7 RN1F.1 | length 9.2
  Top w0.203: IC2F.7@68.775,31.967 68.775,32.815 69.105,33.145 69.723,33.145 70.075,32.793 70.075,29.11 71.018,28.167 RN1F.1@71.018,26.457
NetIC2G_7: IC2G.7 RN1G.1 | length 9.2
  Top w0.203: IC2G.7@68.775,21.967 68.775,22.815 69.105,23.145 69.723,23.145 70.075,22.793 70.075,19.11 71.018,18.167 RN1G.1@71.018,16.457
NetIC2H_7: IC2H.7 RN1H.1 | length 9.2
  Top w0.203: IC2H.7@68.775,11.967 68.775,12.815 69.105,13.145 69.723,13.145 70.075,12.793 70.075,9.11 71.018,8.167 RN1H.1@71.018,6.457
NetIC7_5: IC7.5 IC36.24 | length 76.6
  Top w0.127: IC36.24@97.364,33.49 97.364,32.717 v1(97.399,32.682) ; v2(152,22.5) 152,29.9 154.4,32.3 IC7.5@159.55,32.3
  Bot w0.127: v1(97.399,32.682) 97.399,30.902 99.612,28.69 100.203,28.69 103.203,25.69 111.774,25.69 113.455,24.008 118.066,24.008 119.574,22.5 v2(152,22.5)
NetIC19_9: IC19.9 IC20.14 | length 89.1
  Top w0.127: IC20.14@97.399,6.437 v1(98.501,6.437) ; v1(99.904,78.595) IC19.9@99.904,79.697
  Bot w0.127: v1(98.501,6.437) 96.324,6.437 95.856,6.904 95.856,7.468 94.194,9.13 94.194,9.38 89.44,14.134 89.44,38.53 90.575,39.665 90.575,39.801 90.477,39.9 90.477,40.492 90.575,40.591 90.575,43.079 89.44,44.214 89.44,56.774 89.443,56.777 89.443,57.583 89.44,57.586 89.44,74.991 90.583,76.134 97.075,76.134 97.761,76.82 98.617,76.82 99.904,78.107 v1(99.904,78.595)
NetIC21_2: IC21.2 R51.1 R52.2 | length 3.4
  Top w0.203: R52.2@109.494,50.38 R51.1@109.494,48.88 111.378,48.88 IC21.2@111.393,48.864
NetIC22_4: IC22.4 IC23.4 R54.1 R55.2 | length 7.4
  Top w0.254: R54.1@112.217,42.48 112.289,42.408 IC23.4@113.569,42.408 ; IC23.4@113.832,42.408 114.13,42.408 114.648,41.89 114.648,39.344 114.169,38.865 IC22.4@113.894,38.865
  Top w0.508: IC23.4@113.558,42.408 113.569,42.419 IC23.4@113.844,42.419 113.832,42.431 113.832,43.609 R55.2@113.819,43.621
NetIC24_3: IC24.3 IC26.4 R61.1 R63.2 | length 11.7
  Top w0.254: v1(107.438,18.355) 107.465,18.382 108.167,18.382 IC24.3@108.169,18.384 ; v1(108.837,24.53) 108.921,24.446 108.921,23.953 R63.2@109.244,23.63 109.444,23.83 IC26.4@112.344,23.83
  Bot w0.254: v1(107.438,18.355) 107.47,18.387 107.47,23.163 v1(108.837,24.53)
NetIC25_2: IC25.2 R57.2 | length 4.2
  Top w0.203: IC25.2@147.154,80.405 148.709,78.85 R57.2@150.694,78.85
NetIC25_6: IC25.6 R56.1 R58.2 | length 6.7
  Top w0.203: R58.2@121.813,74.099 121.813,72.311 R56.1@121.944,72.18 123.055,72.18 124.294,73.419 IC25.6@124.294,75.325
NetIC27_2: IC27.2 R60.1 | length 3.7
  Top w0.152: IC27.2@119.329,8.83 119.329,9.265 119.944,9.88 119.944,11.23 120.124,11.41 R60.1@120.944,11.41
NetIC28_5: IC28.5 R66.1 R68.2 | length 3.4
  Top w0.305: R68.2@136.141,60.82 137.391,59.57 R66.1@137.641,59.57 ; R68.2@136.142,61.069 IC28.5@136.142,62.415
NetIC28_9: IC28.9 L7.1 | length 3.3
  Top w0.33: IC28.9@138.242,63.915 140.245,63.915 L7.1@141.165,64.835
NetIC29_4: IC29.4 IC30.4 R70.1 R71.2 | length 7.6
  Top w0.152: IC29.4@107.194,36.532 107.194,36.257 107.742,35.709 v1(108.021,35.709) ; v1(110.821,35.632) 110.821,35.726 110.664,35.883 R70.1@110.664,36.63 R71.2@111.724,36.63 111.795,36.559 IC30.4@111.795,35.379
  Bot w0.152: v1(108.021,35.709) 108.06,35.671 110.782,35.671 v1(110.821,35.632)
NetIC31_3: IC31.3 R111.2 | length 75.4
  Top w0.152: IC31.3@132.691,60.02 133.533,60.02 133.547,60.007 133.955,60.007 v2(134.192,59.77) ; v2(137.33,51.529) 137.33,47.5 139.742,45.088 139.749,45.088 139.868,44.969 139.868,44.962 140.245,44.585 140.245,37.162 137.641,34.558 137.641,21.211 156.63,2.222 156.63,-0.34 156.94,-0.65 R111.2@157.76,-0.65
  L3 w0.152: v2(136.63,56.305) 137.33,55.605 v2(137.33,51.529)
  Bot w0.152: v2(134.192,59.77) 134.192,57.109 134.995,56.305 v2(136.63,56.305)
NetIC31_5: IC31.5 R72.1 R74.2 | length 2.4
  Top w0.127: IC31.5@132.691,61.02 133.421,61.02 R72.1@133.921,60.52 R74.2@133.921,61.52
NetIC31_9: IC31.9 L9.1 | length 3.6
  Top w0.127: L9.1@127.313,60.295 L9.1@128.002,59.606 ; IC31.9@130.504,59.606 IC31.9@130.591,59.52
  Top w0.254: L9.1@128.002,59.606 IC31.9@130.504,59.606
NetIC32_2: IC32.2 R73.1 R75.2 | length 2.8
  Top w0.203: R73.1@109.694,27.85 R75.2@110.694,27.85 111.359,28.515 IC32.2@112.244,28.515
NetIC35_2: IC35.2 RN3.6 | length 8.9
  Top w0.203: RN3.6@94.144,62.44 94.183,62.401 95.873,62.401 96.894,61.38 96.894,58.228 95.971,57.305 IC35.2@94.694,57.305
NetIC35_6: IC35.6 R83.1 RN3.2 | length 16.5
  Top w0.152: R83.1@97.744,67.23 99.269,67.23 100.594,65.905 100.594,61.305 100.459,61.17 RN3.2@99.544,61.17 ; v1(97.769,56.555) 97.869,56.655 IC35.6@99.094,56.655
  Top w0.203: v1(98.419,61.18) 98.429,61.17 RN3.2@99.544,61.17
  L3 w0.203: v1(97.769,56.555) 97.769,57.98 98.419,58.63 v1(98.419,61.18)
NetIC36_23: IC36.23 R76.2 T9.3 | length 38
  Top w0.127: IC36.23@96.864,33.49 96.864,32.545 96.958,32.451 v1(96.958,32.229)
  Top w0.152: R76.2@115.756,14.86 R76.2@116.159,15.264 117.163,16.267 T9.3@117.829,16.267
  Bot w0.127: v1(96.958,32.229) 96.958,30.984 99.506,28.436 100.098,28.436 103.098,25.436 103.348,25.436 103.386,25.397 111.706,25.397 113.35,23.754 117.82,23.754 118.594,22.98 118.594,19.041 116.909,17.356 v1(116.909,15.88)
NetIC36_25: IC36.25 R77.2 | length 2.4
  Top w0.254: IC36.25@97.864,33.49 97.903,33.451 97.903,32.884 98.382,32.405 98.669,32.405 R77.2@99.269,31.805
NetIC36_43: IC36.43 R78.1 | length 5.8
  Top w0.254: v1(96.944,46.38) R78.1@97.474,46.38 ; IC36.43@97.364,41.34 97.364,42.285 v1(97.444,42.365)
  L3 w0.254: v1(96.944,46.38) 97.444,45.88 v1(97.444,42.365)
NetIC37_1: IC37.1 IC37.11 R103.1 R105.1 R106.1 | length 12
  Top w0.127: R106.1@173.698,9.585 173.698,8.508 173.731,8.475 173.731,7.946 173.902,7.775 IC37.11@176.001,7.775 178.821,7.775 180.771,5.825 IC37.1@181.801,5.825 183.081,5.825 R103.1@183.131,5.775
NetIC37_9: IC37.9 IC37.10 R105.2 R106.2 R108.2 | length 5.3
  Top w0.127: R108.2@173.66,10.65 173.66,10.49 R106.2@174.6,9.55 ; R106.2@174.638,9.55 174.638,9.046 ; IC37.10@176.001,8.425 174.721,8.425 174.638,8.508 174.638,9.046 ; IC37.9@176.001,9.075 174.667,9.075 174.638,9.046
NetIC39_4: IC39.4 R110.2 | length 1.9
  Top w0.508: R110.2@161.1,2.55 163.025,2.55 IC39.4@163.03,2.545
NetIC40_3: IC40.3 LD6.1 R116.1 | length 8.1
  Top w0.254: LD6.1@131.13,43.225 131.989,43.225 132.33,43.566 132.33,44.55 132.655,44.875 134.505,44.875 134.961,44.419 134.961,43.2 R116.1@134.961,41.62 ; R116.1@134.93,41.37 R116.1@134.93,41.42
NetIC40_7: IC40.7 R117.2 | length 1.9
  Top w0.254: IC40.7@134.311,47.65 R117.2@134.311,49.55
NetL1A_3: L1A.3 R8A.2 R9A.1 | length 6.1
  Top w0.203: R8A.2@50.564,78.288 50.564,79.113 50.755,79.304 L1A.3@53.26,79.304 53.836,79.88 54.92,79.88 R9A.1@55.352,80.312
NetL1A_4: L1A.4 R1A.2 R2A.1 | length 5.7
  Top w0.203: R1A.2@50.564,82.86 50.564,82.029 50.749,81.844 L1A.4@53.26,81.844 55.268,81.844 R2A.1@55.352,81.76
NetL1B_3: L1B.3 R8B.2 R9B.1 | length 6.1
  Top w0.203: R8B.2@50.564,68.288 50.564,69.113 50.755,69.304 L1B.3@53.26,69.304 53.836,69.88 54.92,69.88 R9B.1@55.352,70.312
NetL1B_4: L1B.4 R1B.2 R2B.1 | length 5.7
  Top w0.203: R1B.2@50.564,72.86 50.564,72.029 50.749,71.844 L1B.4@53.26,71.844 55.268,71.844 R2B.1@55.352,71.76
NetL1C_3: L1C.3 R8C.2 R9C.1 | length 6.1
  Top w0.203: R8C.2@50.577,58.244 50.577,59.069 50.767,59.26 L1C.3@53.273,59.26 53.849,59.836 54.933,59.836 R9C.1@55.365,60.268
NetL1C_4: L1C.4 R1C.2 R2C.1 | length 5.7
  Top w0.203: R1C.2@50.577,62.816 50.577,61.985 50.762,61.8 L1C.4@53.273,61.8 55.281,61.8 R2C.1@55.365,61.716
NetL1D_3: L1D.3 R8D.2 R9D.1 | length 6.1
  Top w0.203: R8D.2@50.564,48.288 50.564,49.113 50.755,49.304 L1D.3@53.26,49.304 53.836,49.88 54.92,49.88 R9D.1@55.352,50.312
NetL1D_4: L1D.4 R1D.2 R2D.1 | length 5.7
  Top w0.203: R1D.2@50.564,52.86 50.564,52.029 50.749,51.844 L1D.4@53.26,51.844 55.268,51.844 R2D.1@55.352,51.76
NetL1E_3: L1E.3 R8E.2 R9E.1 | length 6.1
  Top w0.203: R8E.2@50.564,38.288 50.564,39.113 50.755,39.304 L1E.3@53.26,39.304 53.836,39.88 54.92,39.88 R9E.1@55.352,40.312
NetL1E_4: L1E.4 R1E.2 R2E.1 | length 5.7
  Top w0.203: R1E.2@50.564,42.86 50.564,42.029 50.749,41.844 L1E.4@53.26,41.844 55.268,41.844 R2E.1@55.352,41.76
NetL1F_3: L1F.3 R8F.2 R9F.1 | length 6.1
  Top w0.203: R8F.2@50.564,28.288 50.564,29.113 50.755,29.304 L1F.3@53.26,29.304 53.836,29.88 54.92,29.88 R9F.1@55.352,30.312
NetL1F_4: L1F.4 R1F.2 R2F.1 | length 5.7
  Top w0.203: R1F.2@50.564,32.86 50.564,32.029 50.749,31.844 L1F.4@53.26,31.844 55.268,31.844 R2F.1@55.352,31.76
NetL1G_3: L1G.3 R8G.2 R9G.1 | length 6.1
  Top w0.203: R8G.2@50.564,18.288 50.564,19.113 50.755,19.304 L1G.3@53.26,19.304 53.836,19.88 54.92,19.88 R9G.1@55.352,20.312
NetL1G_4: L1G.4 R1G.2 R2G.1 | length 5.7
  Top w0.203: R1G.2@50.564,22.86 50.564,22.029 50.749,21.844 L1G.4@53.26,21.844 55.268,21.844 R2G.1@55.352,21.76
NetL1H_3: L1H.3 R8H.2 R9H.1 | length 6.1
  Top w0.203: R8H.2@50.564,8.288 50.564,9.113 50.755,9.304 L1H.3@53.26,9.304 53.836,9.88 54.92,9.88 R9H.1@55.352,10.312
NetL1H_4: L1H.4 R1H.2 R2H.1 | length 5.7
  Top w0.203: R1H.2@50.564,12.86 50.564,12.029 50.749,11.844 L1H.4@53.26,11.844 55.268,11.844 R2H.1@55.352,11.76
NetLD6_2: LD6.2 R114.1 | length 1.8
  Top w0.254: LD6.2@131.13,44.875 R114.1@131.13,46.68
NetLD7_2: LD7.2 R119.1 | length 1.3
  Top w0.203: LD7.2@139.03,40.475 R119.1@139.03,41.78
NetLD8_2: LD8.2 R118.1 | length 1.2
  Top w0.203: LD8.2@141.33,40.575 R118.1@141.33,41.78
NetP5_25: P5.25 R41.1 R86.1 | length 122.5
  Top w0.762: P5.25@19.2,60.69 19.2,70.82 23.952,75.572 23.952,81.628 v4(23.93,81.65) ; R41.1@105.444,81.68 v4(105.444,85.88)
  Bot w0.762: v4(23.93,81.65) 25.543,81.65 33.082,89.189 42.135,89.189 49.819,81.505 57.269,81.505 57.649,81.885 57.649,83.085 64.369,89.805 104.519,89.805 105.444,88.88 v4(105.444,85.88)
NetP5_26: P5.26 R42.1 | length 127.7
  Top w0.762: P5.26@16.66,60.69 16.66,70.28 22.758,76.378 22.758,82.722 v4(22.73,82.75) ; R42.1@108.444,81.68 v4(108.444,85.88)
  Bot w0.762: v4(22.73,82.75) 24.93,82.75 32.258,90.078 42.902,90.078 49.008,83.972 56.297,83.972 63.598,91.273 107.051,91.273 108.444,89.88 v4(108.444,85.88)
NetR2A_2: R2A.2 R3A.1 R4A.2 | length 3
  Top w0.203: R2A.2@55.352,83.36 R4A.2@56.876,83.36 58.324,83.36 R3A.1@58.362,83.322
NetR2B_2: R2B.2 R3B.1 R4B.2 | length 3
  Top w0.203: R2B.2@55.352,73.36 58.324,73.36 R3B.1@58.362,73.322
NetR2C_2: R2C.2 R3C.1 R4C.2 | length 3
  Top w0.203: R2C.2@55.365,63.316 58.337,63.316 R3C.1@58.375,63.278
NetR2D_2: R2D.2 R3D.1 R4D.2 | length 3
  Top w0.203: R2D.2@55.352,53.36 R4D.2@56.876,53.36 58.324,53.36 R3D.1@58.362,53.322
NetR2E_2: R2E.2 R3E.1 R4E.2 | length 3
  Top w0.203: R2E.2@55.352,43.36 58.324,43.36 R3E.1@58.362,43.322
NetR2F_2: R2F.2 R3F.1 R4F.2 | length 3
  Top w0.203: R2F.2@55.352,33.36 R4F.2@56.876,33.36 58.324,33.36 R3F.1@58.362,33.322
NetR2G_2: R2G.2 R3G.1 R4G.2 | length 3
  Top w0.203: R2G.2@55.352,23.36 58.324,23.36 R3G.1@58.362,23.322
NetR2H_2: R2H.2 R3H.1 R4H.2 | length 3
  Top w0.203: R2H.2@55.352,13.36 R4H.2@56.876,13.36 58.324,13.36 R3H.1@58.362,13.322
NetR5A_1: R5A.1 SW1A.4 | length 6.4
  Top w0.203: R5A.1@42.652,78.147 R5A.1@42.694,78.105
  Top w0.762: SW1A.4@39.586,81.59 42.367,81.59 42.652,81.305 R5A.1@42.652,78.147
NetR5B_1: R5B.1 SW1B.4 | length 6.4
  Top w0.203: R5B.1@42.652,68.147 R5B.1@42.694,68.105
  Top w0.762: SW1B.4@39.586,71.59 42.367,71.59 42.652,71.305 R5B.1@42.652,68.147
NetR5C_1: R5C.1 SW1C.4 | length 6.4
  Top w0.203: R5C.1@42.665,58.103 R5C.1@42.707,58.061
  Top w0.762: SW1C.4@39.599,61.546 42.38,61.546 42.665,61.261 R5C.1@42.665,58.103
NetR5D_1: R5D.1 SW1D.4 | length 6.4
  Top w0.203: R5D.1@42.652,48.147 R5D.1@42.694,48.105
  Top w0.762: SW1D.4@39.586,51.59 42.367,51.59 42.652,51.305 R5D.1@42.652,48.147
NetR5E_1: R5E.1 SW1E.4 | length 6.4
  Top w0.203: R5E.1@42.652,38.147 R5E.1@42.694,38.105
  Top w0.762: SW1E.4@39.586,41.59 42.367,41.59 42.652,41.305 R5E.1@42.652,38.147
NetR5F_1: R5F.1 SW1F.4 | length 6.4
  Top w0.203: R5F.1@42.652,28.147 R5F.1@42.694,28.105
  Top w0.762: SW1F.4@39.586,31.59 42.367,31.59 42.652,31.305 R5F.1@42.652,28.147
NetR5G_1: R5G.1 SW1G.4 | length 6.4
  Top w0.203: R5G.1@42.652,18.147 R5G.1@42.694,18.105
  Top w0.762: SW1G.4@39.586,21.59 42.367,21.59 42.652,21.305 R5G.1@42.652,18.147
NetR5H_1: R5H.1 SW1H.4 | length 6.4
  Top w0.203: R5H.1@42.652,8.147 R5H.1@42.694,8.105
  Top w0.762: SW1H.4@39.586,11.59 42.367,11.59 42.652,11.305 R5H.1@42.652,8.147
NetR9A_2: R9A.2 R10A.1 R11A.2 | length 3.1
  Top w0.203: R9A.2@55.352,78.712 R11A.2@56.876,78.712 58.146,78.712 R10A.1@58.362,78.496
NetR9B_2: R9B.2 R10B.1 R11B.2 | length 3.1
  Top w0.203: R9B.2@55.352,68.712 58.146,68.712 R10B.1@58.362,68.496
NetR9C_2: R9C.2 R10C.1 R11C.2 | length 3.1
  Top w0.203: R9C.2@55.365,58.668 58.159,58.668 R10C.1@58.375,58.452
NetR9D_2: R9D.2 R10D.1 R11D.2 | length 3.1
  Top w0.203: R9D.2@55.352,48.712 58.146,48.712 R10D.1@58.362,48.496
NetR9E_2: R9E.2 R10E.1 R11E.2 | length 3.1
  Top w0.203: R9E.2@55.352,38.712 58.146,38.712 R10E.1@58.362,38.496
NetR9F_2: R9F.2 R10F.1 R11F.2 | length 3.1
  Top w0.203: R9F.2@55.352,28.712 R11F.2@56.876,28.712 58.146,28.712 R10F.1@58.362,28.496
NetR9G_2: R9G.2 R10G.1 R11G.2 | length 3.1
  Top w0.203: R9G.2@55.352,18.712 58.146,18.712 R10G.1@58.362,18.496
NetR9H_2: R9H.2 R10H.1 R11H.2 | length 3.1
  Top w0.203: R9H.2@55.352,8.712 R11H.2@56.876,8.712 58.146,8.712 R10H.1@58.362,8.496
NetR26_2: R26.2 T1.3 | length 3.6
  Top w0.203: T1.3@7.694,86.48 7.794,86.38 8.444,86.38 9.194,85.63 R26.2@9.194,83.93
NetR28_2: R28.2 T2.3 | length 2.4
  Top w0.203: T2.3@11.194,84.98 11.894,84.98 12.244,84.63 R28.2@12.244,83.38
NetR30_2: R30.2 T3.3 | length 2.3
  Top w0.203: T3.3@14.944,84.88 15.444,84.88 15.694,84.63 15.694,83.48 R30.2@15.494,83.28
NetR32_2: R32.2 T4.3 | length 2.5
  Top w0.203: T4.3@18.43,84.88 19.08,84.88 19.744,84.216 R32.2@19.744,83.28
NetR34_2: R34.2 T5.3 | length 1.7
  Top w0.203: T5.3@15.33,7.4 R34.2@15.33,9.15
NetR37_2: R37.2 T6.3 | length 1.6
  Top w0.203: T6.3@18.93,7.4 R37.2@18.93,9.05
NetR40_2: R40.2 T7.3 | length 2.6
  Top w0.127: R40.2@5.03,7.45 7.58,7.45 T7.3@7.63,7.4
NetR44_2: R44.2 T8.3 | length 32
  Top w0.127: T8.3@11.53,7.4 12.444,7.4 v2(12.48,7.436)
  Top w0.203: R44.2@4.2,25.8 v2(5.5,25.8)
  Bot w0.127: v2(5.5,25.8) 6.6,25.8 8.911,23.489 8.911,18.711 4.33,14.13 4.33,8.749 5.643,7.436 v2(12.48,7.436)
NetR101_1: R101.1 T10.3 | length 2.1
  Top w0.127: T10.3@171.08,-0.45 172.36,-0.45 R101.1@172.96,0.15
NetR102_1: R102.1 R157.2 T10.1 | length 2.9
  Top w0.254: R157.2@166.9,-0.65 166.9,0.26 167.19,0.55 168.73,0.55 T10.1@168.78,0.5
NetR111_1: R111.1 T11.3 | length 1.4
  Top w0.152: R111.1@158.7,-0.65 T11.3@160.08,-0.65
NetRN1A_4: RN1A.4 RN1A.8 | length 8.1
  Top w0.203: RN1A.8@71.024,81.76 71.024,79.965 71.929,79.06 73.297,79.06 73.346,79.109 73.742,79.109 74.834,78.017 RN1A.4@74.834,76.36
NetRN1A_5: RN1A.5 RN1A.6 | length 4
  Top w0.203: RN1A.6@73.558,81.857 73.558,80.516 73.794,80.28 74.419,80.28 74.828,80.689 RN1A.5@74.828,81.857
NetRN1B_4: RN1B.4 RN1B.8 | length 8.1
  Top w0.203: RN1B.8@71.024,71.76 71.024,69.965 71.929,69.06 73.297,69.06 73.346,69.109 73.742,69.109 74.834,68.017 RN1B.4@74.834,66.36
NetRN1B_5: RN1B.5 RN1B.6 | length 4
  Top w0.203: RN1B.6@73.558,71.857 73.558,70.516 73.794,70.28 74.419,70.28 74.828,70.689 RN1B.5@74.828,71.857
NetRN1C_4: RN1C.4 RN1C.8 | length 8.1
  Top w0.203: RN1C.8@71.037,61.716 71.037,59.921 71.942,59.016 73.31,59.016 73.358,59.065 73.755,59.065 74.847,57.973 RN1C.4@74.847,56.316
NetRN1C_5: RN1C.5 RN1C.6 | length 4
  Top w0.203: RN1C.6@73.571,61.813 73.571,60.472 73.807,60.236 74.432,60.236 74.841,60.646 RN1C.5@74.841,61.813
NetRN1D_4: RN1D.4 RN1D.8 | length 8.1
  Top w0.203: RN1D.8@71.024,51.76 71.024,49.965 71.929,49.06 73.297,49.06 73.346,49.109 73.742,49.109 74.834,48.017 RN1D.4@74.834,46.36
NetRN1D_5: RN1D.5 RN1D.6 | length 4
  Top w0.203: RN1D.6@73.544,51.93 73.544,50.588 73.78,50.353 74.405,50.353 74.814,50.762 RN1D.5@74.814,51.93
NetRN1E_4: RN1E.4 RN1E.8 | length 8.1
  Top w0.203: RN1E.8@71.024,41.76 71.024,39.965 71.929,39.06 73.297,39.06 73.346,39.109 73.742,39.109 74.834,38.017 RN1E.4@74.834,36.36
NetRN1E_5: RN1E.5 RN1E.6 | length 4
  Top w0.203: RN1E.6@73.558,41.857 73.558,40.516 73.794,40.28 74.419,40.28 74.828,40.689 RN1E.5@74.828,41.857
NetRN1F_4: RN1F.4 RN1F.8 | length 8.1
  Top w0.203: RN1F.8@71.024,31.76 71.024,29.965 71.929,29.06 73.297,29.06 73.346,29.109 73.742,29.109 74.834,28.017 RN1F.4@74.834,26.36
NetRN1F_5: RN1F.5 RN1F.6 | length 4
  Top w0.203: RN1F.6@73.558,31.857 73.558,30.516 73.794,30.28 74.419,30.28 74.828,30.689 RN1F.5@74.828,31.857
NetRN1G_4: RN1G.4 RN1G.8 | length 8.1
  Top w0.203: RN1G.8@71.024,21.76 71.024,19.965 71.929,19.06 73.297,19.06 73.346,19.109 73.742,19.109 74.834,18.017 RN1G.4@74.834,16.36
NetRN1G_5: RN1G.5 RN1G.6 | length 4
  Top w0.203: RN1G.6@73.558,21.857 73.558,20.516 73.794,20.28 74.419,20.28 74.828,20.689 RN1G.5@74.828,21.857
NetRN1H_4: RN1H.4 RN1H.8 | length 8.1
  Top w0.203: RN1H.8@71.024,11.76 71.024,9.965 71.929,9.06 73.297,9.06 73.346,9.109 73.742,9.109 74.834,8.017 RN1H.4@74.834,6.36
NetRN1H_5: RN1H.5 RN1H.6 | length 4
  Top w0.203: RN1H.6@73.558,11.857 73.558,10.516 73.794,10.28 74.419,10.28 74.828,10.689 RN1H.5@74.828,11.857
NetRN4_1: RN4.1 RN4.2 | length 4.5
  Top w0.203: RN4.2@99.719,51.62 98.734,51.62 98.344,51.23 98.344,50.53 98.524,50.35 RN4.1@99.719,50.35 99.719,49.53 v1(99.744,49.505)